# Altium PCB TEST PLACEMENT.PcbDoc
Units mil, origin at the board's own origin, x right, y up, seen from the top; angles counter-clockwise.
Board outline 6000 x 4000 mil, 2 copper layers (Top Layer, Bottom Layer); 42 components, 53 nets, 192 pads, 11 vias.
Unrouted connection lines stored in the file: 113.
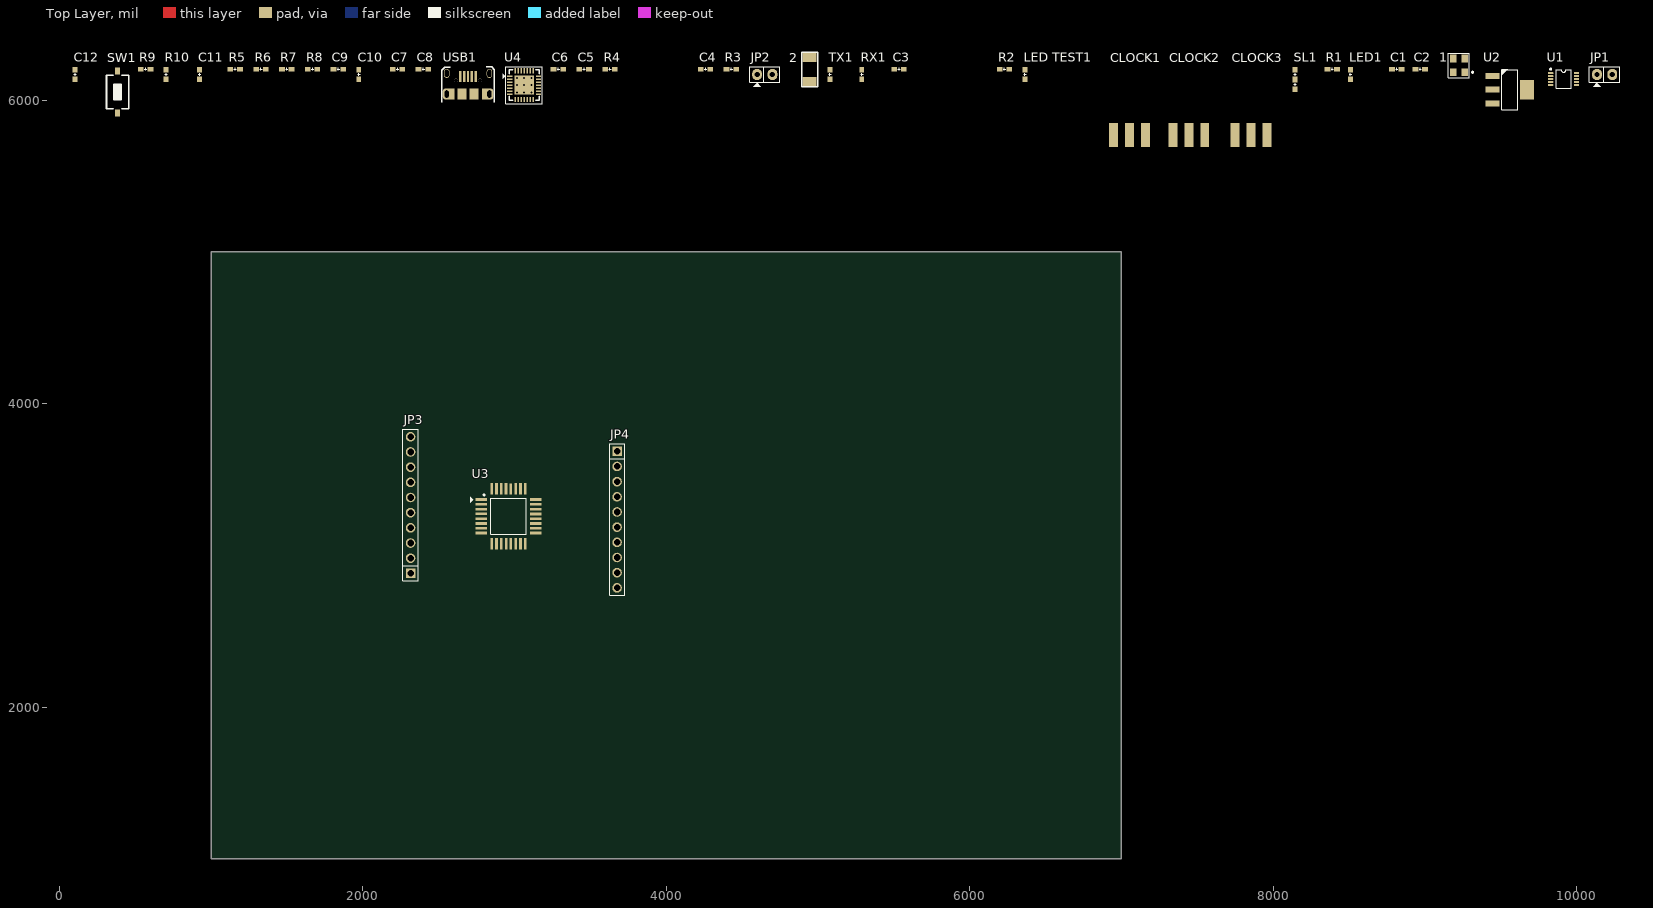
[diagram p0: Top Layer view]
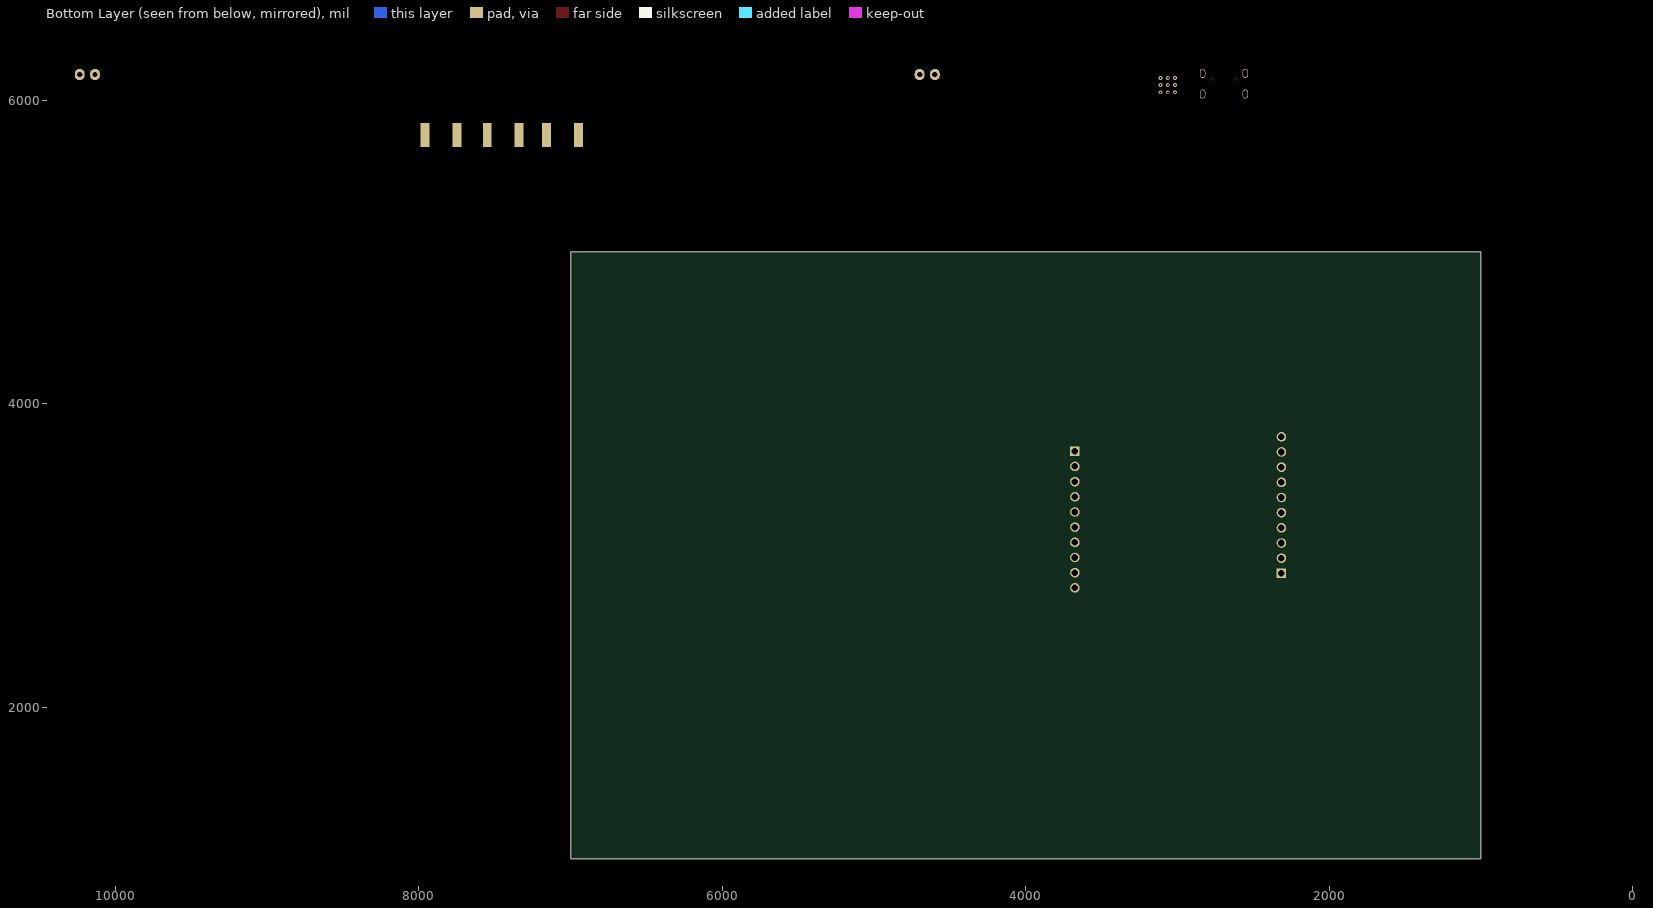
[diagram p1: Bottom Layer view, seen from below]

## Layer stack, top to bottom
Top Solder: solder mask 0.4, Solder Resist, Dk 3.5
Top Layer: signal copper 1.4
Dielectric 1: dielectric 12.6, FR-4, Dk 4.8
Bottom Layer: signal copper 1.4
Bottom Solder: solder mask 0.4, Solder Resist, Dk 3.5

## Board outline
1000,1000 7000,1000 7000,5000 1000,5000

## Design rules (kind name [scope] priority, off if disabled: settings)
Clearance [All] p1: gap=10
PolygonConnect [All] p1: connectstyle=Relief reliefconductorwidth=10 reliefentries=4 polygonreliefangle="90 Angle" airgapwidth=10
RoutingVias [All] p1: holewidth=28 width=50 viastyle="Through Hole" minholewidth=28 minwidth=50 maxholewidth=28 maxwidth=50
SolderMaskExpansion [All] p1: expansion=4
Width [All] p1: maxlimit=10 minlimit=10 preferedwidth=10
30 further rules are at their usual default settings.

## Components (designator, comment, footprint, x,y, rotation, side; value= is the part's Value field where it differs from the comment)
1 "XT4_SMD" XT4-3.2x2.5 9224.06,6229.49 r90 top
2 "8Mhz" "XT 5032" 4944.06,6124.49 r90 top
C1 "100nF" 0603_cap 8814.06,6204.49 r0 top
C2 "100nF" 0603_cap 8969.06,6204.49 r0 top
C3 "22pF" 0603_cap 5534.06,6204.49 r0 top
C4 "22pF" 0603_cap 4259.06,6204.49 r0 top
C5 "100nF" 0603_cap 3459.06,6204.49 r0 top
C6 "100nF" 0603_cap 3289.06,6204.49 r0 top
C7 "100nF" 0603_cap 2229.06,6204.49 r0 top
C8 "4.7uF" 0603_cap 2399.06,6204.49 r0 top
C9 "10uF" 0603_cap 1839.06,6204.49 r0 top
C10 "100nF" 0603_cap 1974.06,6169.49 r90 top
C11 "1uF" 0603_cap 924.06,6169.49 r90 top
C12 "1uF" 0603_cap 104.06,6169.49 r90 top
CLOCK1 "132134" SMA-132322 7054.06,5769.49 r90 top
CLOCK2 "132134" SMA-132322 7444.06,5769.49 r90 top
CLOCK3 "132134" SMA-132322 7854.06,5769.49 r90 top
JP1 "Header 2" JP2 10134.06,6169.49 r0 top
JP2 "Header 2" JP2 4599.06,6169.49 r0 top
JP3 "JP10" JP10-D1T 2314.98,2881.59 r90 top
JP4 "JP10" JP10-D1T 3676.3,3686.22 r270 top
LED1 "LED SMD" 0603_LED 8509.06,6169.49 r90 top
"LED TEST1" "LED SMD" 0603_LED 6364.06,6169.49 r90 top
R1 "1k" 0603_res 8389.06,6204.49 r0 top
R2 "1k" 0603_res 6229.06,6204.49 r0 top
R3 "1k" 0603_res 4429.06,6204.49 r0 top
R4 "1k" 0603_res 3629.06,6204.49 r0 top
R5 "4k7" 0603_res 1159.06,6204.49 r0 top
R6 "4k7" 0603_res 1329.06,6204.49 r0 top
R7 "4k7" 0603_res 1499.06,6204.49 r0 top
R8 "1k" 0603_res 1669.06,6204.49 r0 top
R9 "10K" 0603_res 569.06,6204.49 r0 top
R10 "10K" 0603_res 704.06,6169.49 r90 top
RX1 "LED SMD" 0603_LED 5289.06,6169.49 r90 top
SL1 "SL" SL_0603 8144.06,6104.49 r90 top
SW1 "SW" SW-SMD 384.06,6054.49 r90 top
TX1 "LED SMD" 0603_LED 5079.06,6169.49 r90 top
U1 "Si5351" MSOP10_L 9914.06,6139.49 r0 top
U2 "AMS1117" SOT223_N 9559.06,6069.49 r0 top
U3 "ATMEGA328P-AU" QFP7X7-G32/X.45N 2960.22,3257.9 r0 top
U4 "CP2102" "QFN28 - 9" 3064.06,6099.49 r0 top
USB1 "Micro USB" "MICROUSB - v2" 2694.06,6084.49 r0 top

## Footprints (in the part's own frame and the unit in brackets; to place one, negate y for a bottom-side part, rotate by r counter-clockwise, add the part's x,y. Pads: shape width x height; smd on the part's side, far side on the other; paste and mask are expansions set on the pad)
0603_cap [mm]
  rect 0.95x0.8 smd mask+0: 1(-0.8,0) 2(0.8,0)
  silkscreen extent -0.2,-0.2 0.2,0.2, body extent -0.8,-0.4 0.8,0.4, height 0.3
0603_LED [mm]
  rect 0.95x0.8 smd mask+0: 1(-0.8,0) 2(0.8,0)
  silkscreen extent -0.2,-0.2 0.2,0.2, body extent -0.8,-0.4 0.8,0.4, height 0.38
0603_res [mm]
  rect 0.95x0.8 smd mask+0: 1(-0.8,0) 2(0.8,0)
  silkscreen extent -0.2,-0.2 0.2,0.2, body extent -0.8,-0.43 0.8,0.43, height 0.48
JP2 [mil]
  oval 65x75 hole 36: 1(0,0) 2(101,0)
  silkscreen extent -50,-81 150,50, body extent -48,-50 148,48, height 323
JP10-D1T [mm] "10 pins, 1 row, straight, gold plating"
  rect 1.6x1.6 hole 1.1: 1(0,0)
  round 1.6 hole 1.1: 2(2.54,0) 3(5.08,0) 4(7.62,0) 5(10.16,0) 6(12.7,0) 7(15.24,0) 8(17.78,0) 9(20.32,0) 10(22.86,0)
  silkscreen extent -1.27,-1.27 24.13,1.27, body extent -1.27,-1.27 24.13,1.27, height 8.54
"MICROUSB - v2" [mm]
  rect 0.4x1.85 smd: 1(-1.312,1.8) 2(-0.663,1.8) 3(-0.012,1.8) 4(0.637,1.8) 5(1.288,1.8)
  oval 0.9x1.5 hole 0.65 slot 1.2 at 90 deg: 6(3.575,2.338) 7(-3.575,2.338) 8(3.575,-1.112) 9(-3.575,-1.112)
  rect 1.5x1.9 smd: 8(0.988,-1.112) 9(-1.012,-1.112)
  rect 1x1.9 smd: 8(2.812,-1.112) 9(-2.812,-1.112)
  rrect80% 1.5x1.9 smd: 8(3.525,-1.112) 9(-3.525,-1.112)
  silkscreen extent -4.4,-2.5 4.4,3.41, body extent -4.1,-3.7 4.1,1.73, height 2.71
MSOP10_L [mil]
  rrect50% 35x12.01 smd: 1(-85.5,39.37)
  rrect50% 35x12 smd: 2(-85.5,19.69) 3(-85.5,0) 4(-85.5,-19.69) 5(-85.5,-39.37) 6(85.5,-39.37) 7(85.5,-19.69) 8(85.5,0) 9(85.5,19.69) 10(85.5,39.37)
  silkscreen extent -90,-60 50,70, body extent -96,-59 96,59, height 45
"QFN28 - 9" [mm]
  rect 3.2x3.2 smd: 0(0,0)
  rect 0.9x0.25 smd mask+0.02: 1(-2.4,1.5) 2(-2.4,1) 3(-2.4,0.5) 4(-2.4,0) 5(-2.4,-0.5) 6(-2.4,-1) 7(-2.4,-1.5) 15(2.4,-1.5) 16(2.4,-1) 17(2.4,-0.5) 18(2.4,0) 19(2.4,0.5) 20(2.4,1) 21(2.4,1.5)
  rect 0.25x0.9 smd mask+0.02: 8(-1.5,-2.4) 9(-1,-2.4) 10(-0.5,-2.4) 11(0,-2.4) 12(0.5,-2.4) 13(1,-2.4) 14(1.5,-2.4) 22(1.5,2.4) 23(1,2.4) 24(0.5,2.4) 25(0,2.4) 26(-0.5,2.4) 27(-1,2.4) 28(-1.5,2.4)
  silkscreen extent -3.6,-3.1 3,3.1, body extent -2.5,-2.5 2.5,2.5, height 1
QFP7X7-G32/X.45N [mm] "QFP; 32 Leads; Body 7 x 7 mm; Pitch 0.8 mm"
  rect 1.905x0.45 smd: 1(-4.583,2.8) 2(-4.583,2) 3(-4.583,1.2) 4(-4.583,0.4) 5(-4.583,-0.4) 6(-4.583,-1.2) 7(-4.583,-2) 8(-4.583,-2.8) 17(4.572,-2.806) 18(4.572,-2.006) 19(4.572,-1.206) 20(4.572,-0.406) 21(4.572,0.394) 22(4.572,1.194) 23(4.572,1.994) 24(4.572,2.794)
  rect 0.45x1.905 smd: 9(-2.794,-4.572) 10(-1.994,-4.572) 11(-1.194,-4.572) 12(-0.394,-4.572) 13(0.406,-4.572) 14(1.206,-4.572) 15(2.006,-4.572) 16(2.806,-4.572) 25(2.8,4.583) 26(2,4.583) 27(1.2,4.583) 28(0.406,4.572) 29(-0.4,4.583) 30(-1.2,4.583) 31(-2,4.583) 32(-2.8,4.583)
  silkscreen extent -6.43,-3 3,3.7, body extent -4.74,-4.86 4.86,4.74, height 1.13
SL_0603 [mm]
  rect 0.95x0.8 smd mask+0: 1(-0.8,0) 2(0.8,0) 3(2.451,0)
  silkscreen extent -0.2,-0.2 1.85,0.2, body extent 0.85,-0.43 2.45,0.43, height 0.48
SMA-132322 [mm] "SMA"
  rect 4x1.5 smd: 1(0,0) 2(0,2.667) 3(0,-2.667)
  rect 4x1.5 smd far side: 4(0,-2.667) 5(0,2.667)
  body extent -1.84,-3.17 11.46,3.18, height 3.8
SOT223_N [mm] "SOT223, 4-Leads, Body 6.5x3.5mm, Pitch 2.3mm, Lead Span 7mm, IPC Medium Density"
  rect 2.4x1 smd: 1(-2.9,2.3) 2(-2.9,0) 3(-2.9,-2.3)
  rect 2.4x3.3 smd: 4(2.9,0)
  silkscreen extent -1.35,-3.35 1.35,3.4, body extent -3.65,-3.35 3.65,3.35, height 1.8
SW-SMD [mm] "Switch SMD type"
  rect 1.2x0.8 smd: 1(-3.5,0) 2(3.5,0)
  silkscreen extent -2.82,-1.85 2.82,1.85, body extent -3.05,-1.85 3.05,1.85, height 2.5
XT4-3.2x2.5 [mm]
  rect 1.3x1.1 smd: 1(-1.15,-0.95) 2(1.15,-0.95) 3(1.15,0.95) 4(-1.15,0.95)
  silkscreen extent -2.06,-2.41 2.06,1.75, body extent -1.6,-1.25 1.6,1.25, height 0.61
"XT 5032" [mm]
  rect 1.5x2.4 smd: 1(0,0) 2(4,0)
  silkscreen extent -0.89,-1.4 4.83,1.27, body extent -0.47,-1.6 4.53,1.6, height 1.31

## Part data
1: "4 pin crystal surface mount"
2: library part XT455k, "Crystal 455kHz Infrared"
C1 C2 C3 C4 C5 C6 C7 C8 C9 C10 C11 C12: library part CN4, "Cap np W0.4"
CLOCK1 CLOCK2 CLOCK3: "SMA Connector - STRAIGHT JACK FOR P.C. BOARD - Female"
JP1 JP2: "Header, 2-Pin"
JP3 JP4: library part Con10, "Connector 10"
LED1 "LED TEST1" RX1 TX1: library part LED-SMD-0603
R1 R2 R3 R4 R5 R6 R7 R8 R9 R10: library part R, "Resistor 1/4W"
SW1: library part SW2, "Switch button 2 pin"
U1: "I2C-PROGRAMMABLE ANY-FREQUENCY CMOS CLOCK"
U3: "8-bit AVR Microcontrollers"
U4: "SINGLE-CHIP USB-TO-UART BRIDGE"
USB1: library part "USB Micro"

## Via types
v1: diameter 25.98, hole 12.99, Top Layer to Bottom Layer, tented both sides, 9 vias
v2: diameter 25.59, hole 25.59, Top Layer to Bottom Layer, tented both sides, 2 vias

## Nets (pads, with @x,y where several pads share a name; then routed paths per layer and width w, separated by ;. In a path a pad name is that pad's centre, name@x,y a point inside that pad or via, vN(x,y) a via of type N, cw(c..) or ccw(c..) an arc to the next point about the centre after c; other vN are vias at no path point)
A0: JP4.6 U3.23
A1: JP4.5 U3.24
A2: JP4.4 U3.25
A3: JP4.3 U3.26
A6: U3.19
A7: U3.22
D0/RXD: JP3.8 U3.30
D1/TXD: JP3.7 U3.31
D2: JP3.6 U3.32
D3: JP3.5 U3.1
D4: JP3.4 U3.2
D5: JP3.3 U3.9
D6: JP3.2 U3.10
D7: JP3.1 U3.11
D+: U4.4 USB1.3
D-: U4.5 USB1.2
DTR: C11.1
"EXTERNAL 3V3": C2.2 SL1.3 U2.2
GND: 1.2 1.4 "LED TEST1.2" C1.1 C2.1 C3.2 C4.2 C5.1 C6.1 C7.2 C8.1 C9.1 C10.1 C12.1 CLOCK1.2 CLOCK1.3 CLOCK1.4 CLOCK1.5 CLOCK2.2 CLOCK2.3 CLOCK2.4 CLOCK2.5 CLOCK3.2 CLOCK3.3 CLOCK3.4 CLOCK3.5 JP3.9 R1.1 R7.1 SW1.1 U1.8 U2.1 U3.3 U3.5 U3.21 U4.0 U4.3 USB1.5 USB1.6 USB1.7 USB1.8 USB1.9
  other v1: 3016.81,6052.25 3064.06,6052.25 3111.3,6052.25 3016.81,6099.49 3064.06,6099.49 3111.3,6099.49 3016.81,6146.74 3064.06,6146.74 3111.3,6146.74
"INTERNAL 3V3": C7.1 C8.2 SL1.1 U4.6
MISO: JP4.8 U3.16
MOSI: JP4.9 U3.15
Net1_1: 1.1 U1.2
Net1_3: 1.3 U1.3
Net2_1: 2.1 C4.1 U3.7
Net2_2: 2.2 C3.1 U3.8
NetC5_2: C5.2 U3.20
NetC12_2: C12.2 R8.1 SW1.2
NetLED1_2: LED1.2 R1.2
"NetLED TEST1_1": "LED TEST1.1" R2.2
NetR3_2: R3.2 RX1.2
NetR4_2: R4.2 TX1.2
NetR5_2: R5.2 U4.9
NetR6_2: R6.2 U4.11
NetR7_2: R7.2 U4.12
PC6/RESET: U3.29
PLL_CLOCK0: CLOCK1.1 U1.10
PLL_CLOCK1: CLOCK2.1 U1.9
PLL_CLOCK2: CLOCK3.1 U1.6
RAW: C1.2 C9.2 C10.2 R5.1 R6.1 U2.3 U4.7 U4.8 USB1.1
RESET: C11.2
RX: R3.1 U4.26
SCK: JP4.7 R2.1 U3.17
SCL: R9.1
SCL1: JP2.2 U1.4
SCL2: JP4.1 U3.28
SDA: R10.1
SDA1: JP2.1
SDA2: JP4.2 U3.27
SS: JP4.10 U3.14
TX: R4.1 U4.25
VDD_3V3: C6.2 JP1.1 JP3.10 LED1.1 R8.2 R9.2 R10.2 RX1.1 SL1.2 TX1.1 U1.1 U3.4 U3.6 U3.18
VDD_IO: JP1.2 U1.7
pads on no net: U1.5 U2.4 U3.12 U3.13 U4.1 U4.2 U4.10 U4.13 U4.14 U4.15 U4.16 U4.17 U4.18 U4.19 U4.20 U4.21 U4.22 U4.23 U4.24 U4.27 U4.28 USB1.4
copper on no net:
  other v2: 2614.82,6131.26 2772.3,6131.26